# Altium PCB FarhanDaemi.PcbDoc
Units mil, origin at the board's own origin, x right, y up, seen from the top; angles counter-clockwise.
Board outline 2310 x 2065 mil, 2 copper layers (Top Layer, Bottom Layer); 52 components, 0 nets, 189 pads, 53 vias.
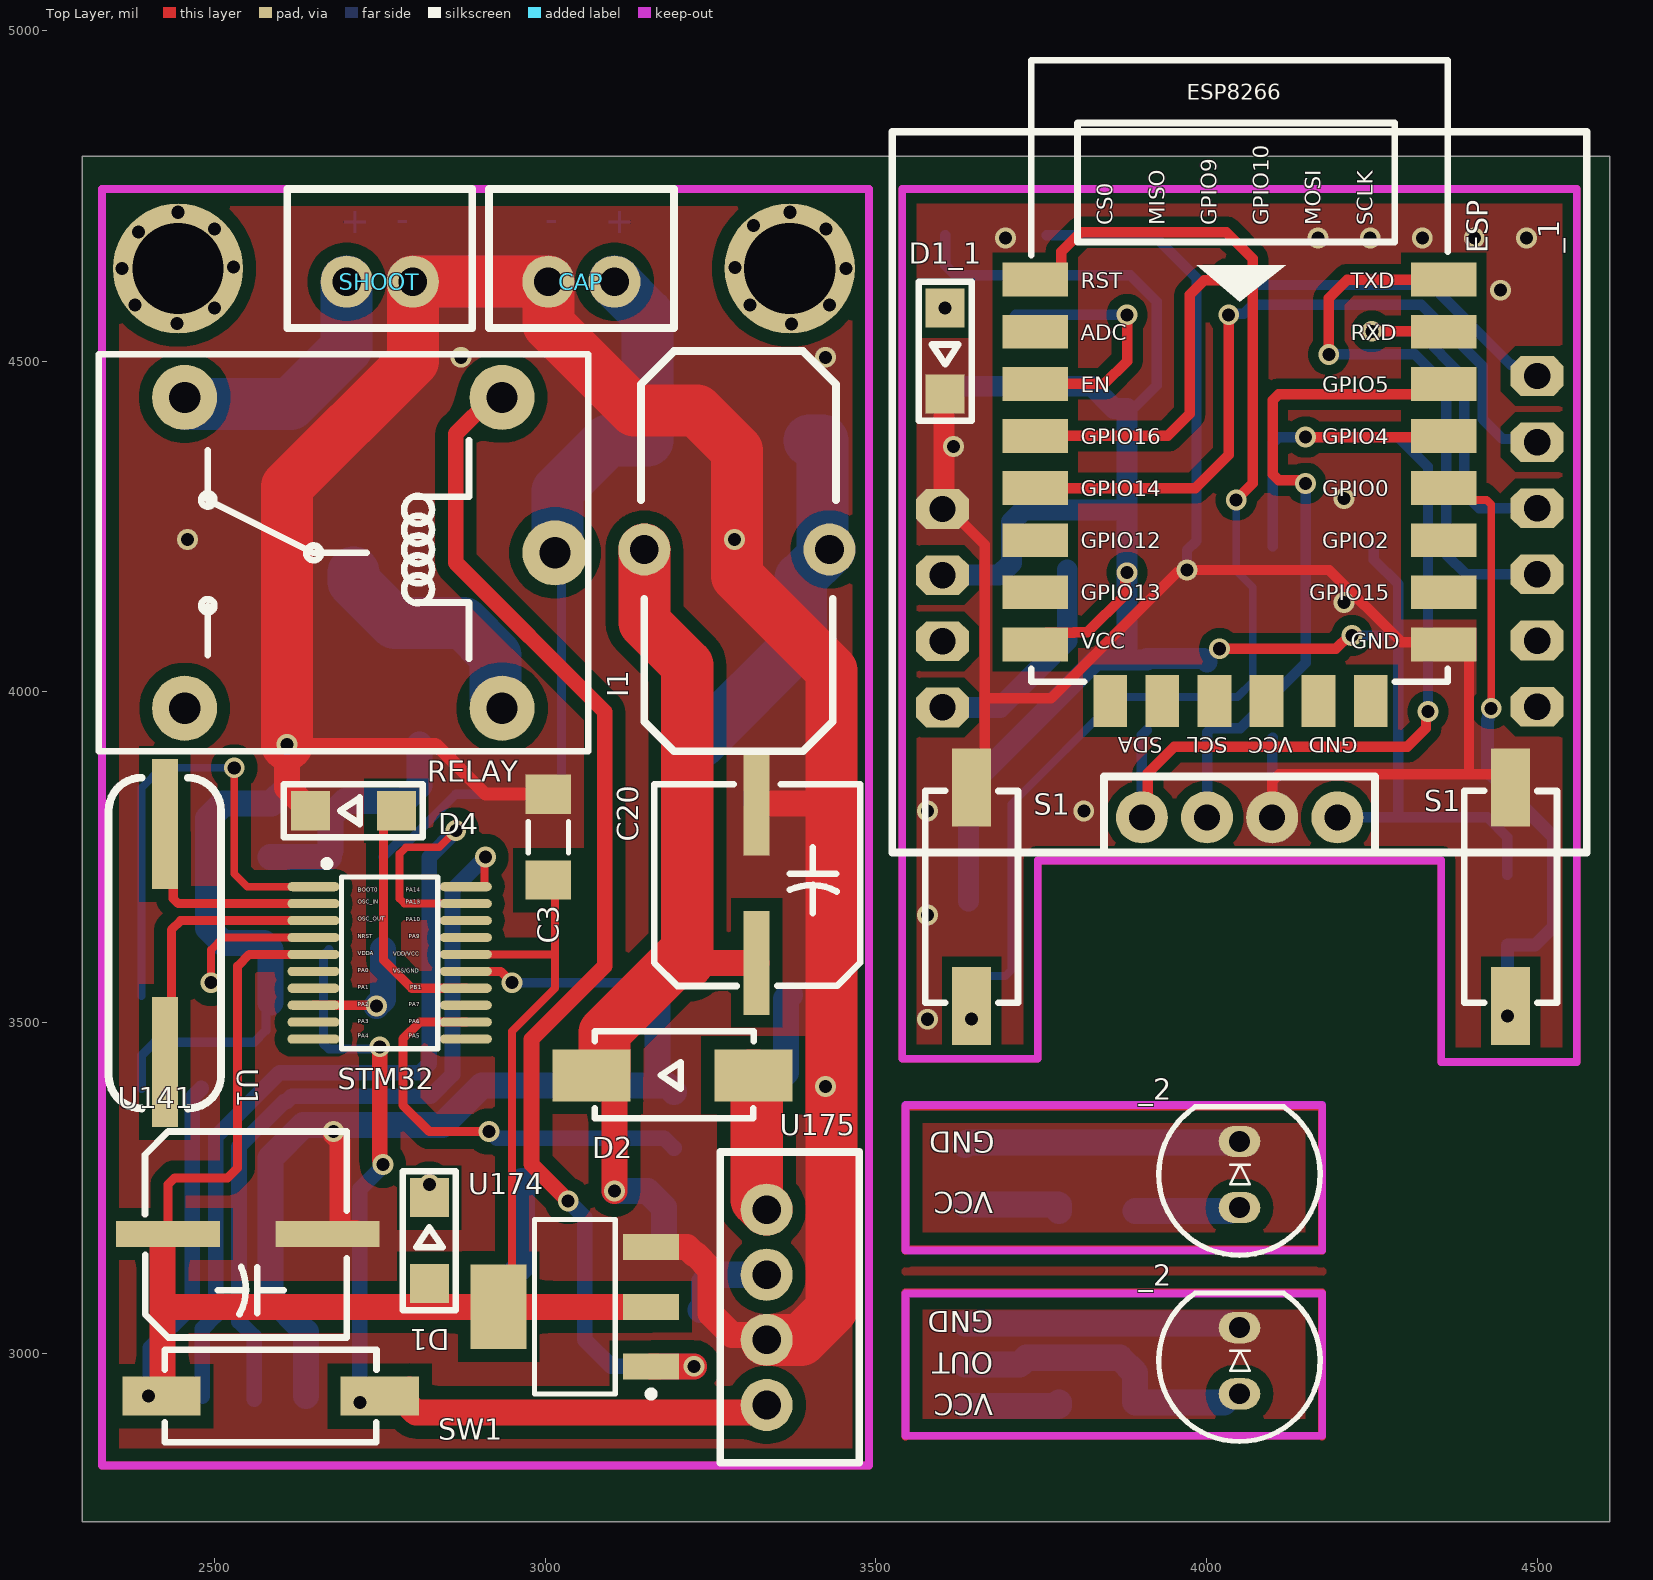
[diagram p0: Top Layer view]
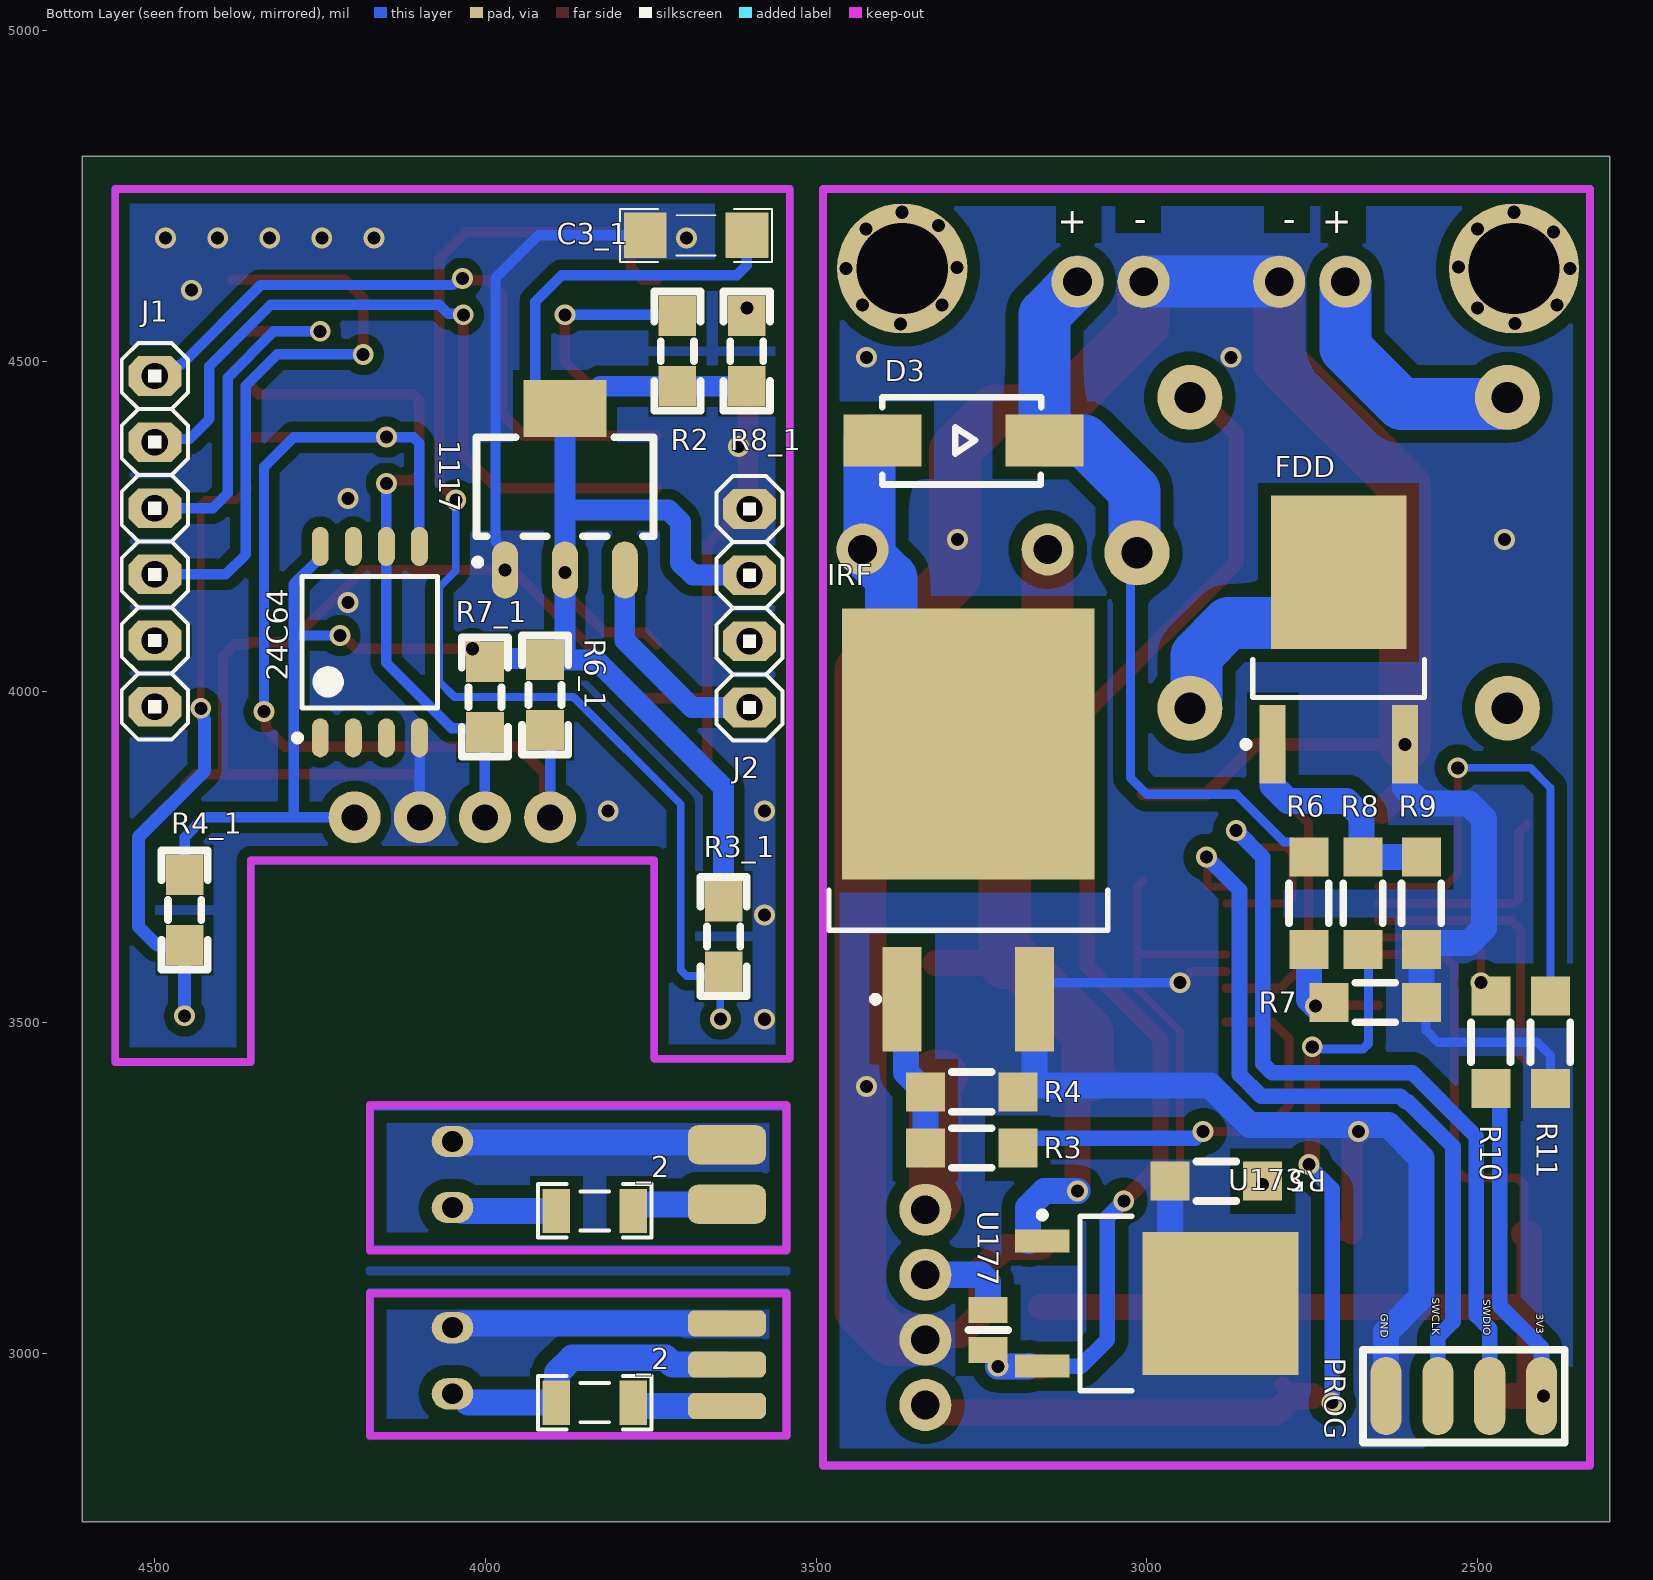
[diagram p1: Bottom Layer view, seen from below]

## Layer stack, top to bottom
Top Solder: solder mask 0.4, Solder Resist, Dk 3.5
Top Layer: signal copper 1.4
Dielectric 1: dielectric 12.6, FR-4, Dk 4.8
Bottom Layer: signal copper 1.4
Bottom Solder: solder mask 0.4, Solder Resist, Dk 3.5

## Board outline
2300,2745 2300,4810 4610,4810 4610,2745

## Design rules (kind name [scope] priority, off if disabled: settings)
Clearance [All] p1: gap=10 ignorepadtopadclearanceinfootprint=FALSE except(0: Arc-Hole Track-Hole SMDPad-Hole THPad-Hole Via-Hole Fill-Hole Poly-Hole Region-Hole Text-Hole)
ComponentClearance [All] p1 off: gap=10 collisioncheckmode=3 verticalgap=10 showdistances=FALSE
Height [All] p1 off: minheight=0 maxheight=1000 prefheight=500
PolygonConnect [All] p1: connectstyle=Relief reliefconductorwidth=10 reliefentries=4 polygonreliefangle="90 Angle" airgapwidth=10
RoutingVias [All] p1: holewidth=28 width=50 viastyle="Through Hole" minholewidth=28 minwidth=50 maxholewidth=28 maxwidth=50
SolderMaskExpansion [All] p1: expansion=4 istentingtop=FALSE
Width [All] p1: maxlimit=10 minlimit=10 preferedwidth=10
28 further rules are at their usual default settings.

## Components (designator, comment, footprint, x,y, rotation, side; value= is the part's Value field where it differs from the comment)
24C64 "Comment" 24C64 4175,4075 r90 bottom
1117 "Comment" SOT223 3880,4310 r90 bottom
_1 "Comment" "OLED 0.96inch" 4050,4301.72 r180 top locked
_2 "Comment" LED5MM_BLUE 4049.92,3270 r90 top
_2 "Comment" LED5MM_BLUE 4049.92,2988.46 r90 top
_2 "Comment" RES1206#1 3834.92,3215 r180 bottom
_2 "Comment" RES1206#1 3834.92,2925 r180 bottom
C3 "Comment" CAP1206 3005,3780 r90 top
C3_1 "Comment" CAPC4817X12N 3681.77,4690 r180 bottom
C20 "Comment" "CAP SMD 100uF 16V" 3320,3710 r90 top
CAP "Comment" "XH 2pin" 3055,4655 r0 top
D1 "Comment" "LED BLUE 1206" 2825,3170 r90 top
D1_1 "Comment" "LED BLUE 1206" 3605,4515 r270 top
D2 "Comment" Diode 3195,3420 r180 top
D3 "Comment" Diode 3280,4380 r180 bottom
D4 "Comment" "LED BLUE 1206" 2710,3820 r180 top
ESP "Comment" ESP8266 4050,4475 r0 top locked
FDD "Comment" FDD6690A 2710,4080 r90 bottom
I1 "Comment" inductor 3290,4220 r0 top
IRF "Comment" IRF540S 3270,3796.81 r90 bottom
J1 "Comment" My_1X06 4500.1,4227.42 r90 bottom locked
J2 "Comment" My_1X04 3600.9,4126.28 r90 bottom locked
PROG "Comment" PROGRAMER 2523.33,2935 r0 bottom
R2 "Comment" RESC3413X04N 3710,4515 r270 bottom
R3 "Comment" RES1206#2 3265,3310 r180 bottom
R3_1 "Comment" RESC3413X04N 3640,3630 r90 bottom
R4 "Comment" RES1206#2 3265,3394.9 r180 bottom
R4_1 "Comment" RESC3413X04N 4455,3670 r270 bottom
R5 "Comment" RES1206#2 2895,3260 r0 bottom
R6 "Comment" RES1206#2 2755,3680 r90 bottom
R6_1 "Comment" RESC3413X04N 3910,3995 r270 bottom
R7 "Comment" RES1206#2 2655,3530 r180 bottom
R7_1 "Comment" RESC3413X04N 4000.95,3991.85 r270 bottom
R8 "Comment" RES1206#2 2673.37,3680 r270 bottom
R8_1 "Comment" RESC3413X04N 3605,4515 r270 bottom
R9 "Comment" RES1206#2 2585,3680 r270 bottom
R10 "Comment" RES1206#2 2480,3470 r270 bottom
R11 "Comment" RES1206#2 2389.95,3470 r270 bottom
RELAY "Comment" "Relay 5V 10A" 2695,4210 r0 top
S1 "Comment" pushbutton 4460,3690 r90 top
S1 "Comment" pushbutton 3645,3690 r90 top
SHOOT "Comment" "XH 2pin" 2750,4655 r0 top
STM32 "Comment" STM32F030F4P6 2765,3590 r0 top
SW1 "Comment" pushbutton 2585,2935 r180 top
U1 "Comment" "Crystal Oscilator" 2425,3620 r270 top
U141 "Comment" "CAP SMD 100uF 16V" 2550,3180 r0 top
U173 "Comment" "7805 (SOT-252)" 2985,3075 r180 bottom
U174 "Comment" AMS1117 3045,3070 r180 top
U175 "Comment" "XH 4PIN" 3370,3069.08 r270 top
U177 "Comment" Jumper 3240,3035 r90 bottom
? "Comment" SCREW 2445,4640 r0 top
? "Comment" SCREW 3370,4640 r270 top

## Footprints (in the part's own frame and the unit in brackets; to place one, negate y for a bottom-side part, rotate by r counter-clockwise, add the part's x,y. Pads: shape width x height; smd on the part's side, far side on the other; paste and mask are expansions set on the pad)
24C64 [mm] "SOIC, 8-Leads, Body 5.21x5.28mm, Pitch 1.27mm, IPC Medium Density"
  oval 1.5x0.65 smd: 1(-3.675,1.905) 2(-3.675,0.635) 3(-3.675,-0.635) 4(-3.675,-1.905) 5(3.675,-1.905) 6(3.675,-0.635) 7(3.675,0.635) 8(3.675,1.905)
  silkscreen extent -3.8,-2.6 2.53,2.91, body extent -3.98,-2.6 3.98,2.6, height 1.97
"7805 (SOT-252)" [mm] "D-PAK, 3-Pads, Body 6.25x6.71mm (max), IPC Medium Density"
  rect 2.1x0.9 smd: 1(-4.4,2.4) 3(-4.4,-2.4)
  rect 6x5.5 smd: 4(2.45,0)
  silkscreen extent -4.52,-3.35 -0.95,3.52, body extent -5.06,-3.35 4.85,3.35, height 2.45
AMS1117 [mm] "SOT223, 4-Leads, Body 6.30x7.00mm (avg), Pitch 2.30mm, IPC Medium Density"
  rect 2.15x1 smd: 1(-2.925,2.3) 2(-2.925,0) 3(-2.925,-2.3)
  rect 2.15x3.25 smd: 4(2.925,0)
  silkscreen extent -3.05,-3.35 1.55,3.47, body extent -3.5,-3.35 3.5,3.35, height 1.65
CAP1206 [mm] "Chip Capacitor, 2-Leads, Body 3.20x1.60mm, IPC Medium Density"
  rect 1.5x1.75 smd: 1(-1.651,0) 2(1.651,0)
  silkscreen extent -0.6,-0.77 0.6,0.77, body extent -1.6,-0.8 1.6,0.8, height 1
"CAP SMD 100uF 16V" [mm]
  rect 4x1 smd: 1(-3.048,0) 2(3.07,0.003)
  silkscreen extent -3.94,-3.97 3.81,3.94, body extent -4.75,-4.15 4.75,4.15, height 10.51
CAPC4817X12N [mm] "Chip Capacitor, 2-Leads, Body 4/80x1/70mm, IPC Medium Density-Design:Abbas Basereh"
  rect 1.65x1.75 smd: 1(-1.95,0) 2(1.95,0)
  silkscreen extent -2.92,-1.02 2.92,1.02, body extent -1.6,-0.8 1.6,0.8, height 1
"Crystal Oscilator" [mm]
  rect 5x1 smd: 1(-4.572,0) 2(4.572,0)
  silkscreen extent -6.35,-2.16 6.35,2.16, body extent -6.5,-2.35 6.5,2.35, height 4.21
Diode [mm]
  rect 3x2 smd: 1(-3.048,0) 2(3.175,0)
  silkscreen extent -3.06,-1.69 3.05,1.65, body extent -3.12,-1.78 3.12,1.78, height 2.26
ESP8266 [mm]
  rect 2.5x1.3 smd: 1(-7.845,3.763) 2(-7.845,1.761) 3(-7.845,-0.24) 4(-7.845,-2.242) 5(-7.845,-4.243) 6(-7.845,-6.244) 7(-7.845,-8.246) 8(-7.845,-10.247) 15(7.845,-10.247) 16(7.845,-8.246) 17(7.845,-6.244) 18(7.845,-4.243) 19(7.845,-2.242) 20(7.845,-0.24) 21(7.845,1.761) 22(7.845,3.763)
  rect 1.3x2 smd: 9(-4.967,-12.417) 10(-2.965,-12.417) 11(-0.964,-12.417) 12(1.037,-12.417) 13(3.039,-12.417) 14(5.04,-12.417)
  silkscreen extent -8,-11.68 8,12.19, body extent -8,-11.75 8,12.25, height 3.17
FDD6690A [mm] "D-PAK, 3-Pads, Body 5.85x6.66mm (max), IPC Medium Density"
  rect 3x1 smd: 1(-4.05,2.54) 3(-4.05,-2.54)
  rect 5.9x5.2 smd: 4(2.55,0)
  silkscreen extent -4.17,-3.3 -0.8,3.69, body extent -5,-3.3 5,3.3, height 3.03
inductor [mm]
  round 2 hole 1.1: 1(-3.556,-0.127) 2(3.556,-0.127)
  silkscreen extent -3.68,-7.87 3.81,7.49, body extent -4.15,-8.42 4.15,8.17, height 16.29
IRF540S [mm] "D2-PAK, 3-Pads, Body 7.93x8.70mm (max), IPC Medium Density"
  rect 4x1.5 smd: 1(-6.65,2.54) 3(-6.65,-2.54)
  rect 10.4x9.7 smd: 4(3.15,0)
  silkscreen extent -6.77,-5.35 -2.45,5.35, body extent -7.65,-5.33 7.6,5.33, height 5.08
Jumper [mm]
  rect 1x1.5 smd: 1(-0.762,0) 2(0.762,0)
  silkscreen extent 0,-0.76 0,0.76
LED5MM_BLUE [mm] "LED 5MM THROUGH HOLE BLUE-Designer Abbas Basereh"
  oval 1.2x1.6 hole 0.8: 1(-1.27,0) 2(1.27,0)
  silkscreen extent -3.1,-3.1 2.6,3.1, body extent -2.99,-2.98 2.43,3.04, height 12.31
"LED BLUE 1206" [mm]
  rect 1.5x1.5 smd: 1(-1.651,0) 2(1.651,0)
  silkscreen extent -2.67,-1.02 2.67,1.02, body extent -1.61,-0.85 1.66,0.8, height 0.9
My_1X04 [mil]
  oct 60x80 hole 40: 1(-150,0) 2(-50,0) 3(50,0) 4(150,0)
  silkscreen extent -200,-50 200,50, body extent -198,-49 202,51, height 234
My_1X06 [mil]
  oct 60x80 hole 40: 1(-250,0) 2(-150,0) 3(-50,0) 4(50,0) 5(150,0) 6(250,0)
  silkscreen extent -300,-50 300,50, body extent -300,-51 300,49, height 234
"OLED 0.96inch" [mm]
  round 2 hole 1: 1(-3.758,12.49) 2(-1.256,12.49) 3(1.246,12.49) 4(3.748,12.49)
  silkscreen extent -13.34,-13.84 13.34,13.84, body extent -13.5,-14 13.5,14, height 8.01
PROGRAMER [mm]
  oval 1.2x3 smd: 1(-3.048,0) 2(-1.058,0) 3(0.931,0) 4(2.921,0)
  silkscreen extent -3.94,-1.78 3.81,1.78
pushbutton [mm]
  rect 3x1.5 smd: 1(-4.191,0) 2(4.191,0)
  silkscreen extent -4.06,-1.78 4.06,1.78, body extent -4.17,-1.82 4.17,1.82, height 4.25
"Relay 5V 10A" [mm]
  round 2.5 hole 1.2: 1(-6.096,5.969) 2(-6.096,-5.969) 3(6.096,-5.969) 4(6.096,5.969) 5(8.128,0)
  silkscreen extent -9.4,-7.62 9.4,7.62, body extent -9.6,-7.8 9.6,7.8, height 15.9
RES1206#1 [mm] "Chip Resistor, 2-Leads, Body 3/20x1/60mm, IPC Medium Density DESIGNER:ABBAS BASEREH"
  rect 1.05x1.7 smd: 1(-1.475,0) 2(1.475,0)
  silkscreen extent -2.17,-1.02 2.17,1.02, body extent -1.65,-0.85 1.65,0.85, height 0.94
RES1206#2 [mm]
  rect 1.5x1.5 smd: 1(-1.778,0) 2(1.778,0)
  silkscreen extent -0.76,-0.76 0.76,0.76, body extent -1.58,-0.82 1.58,0.82, height 0.53
RESC3413X04N [mm] "Chip Resistor, 2-Leads, Body 3/40x1/30mm, IPC Medium Density-Design:Abbas Basereh"
  rect 1.55x1.45 smd: 1(-1.35,0) 2(1.35,0)
  silkscreen extent -2.29,-0.89 2.29,0.89, body extent -1.25,-0.62 1.25,0.62, height 0.79
SCREW [mm]
  round 5 hole 3.5: 1(0,0)
  round 0 hole 0.5: ""(-2.159,0) ""(-1.651,-1.397) ""(-1.524,1.397) ""(-0.031,-2.11) ""(0,2.159) ""(1.397,-1.524) ""(1.397,1.524) ""(2.128,0.059)
SOT223 [mm] "SOT223, 4-Leads, Body 6.5x3.5mm, Pitch 2.30mm-Designer Abbas Basereh"
  oval 2.2x1 smd: 1(-3.2,2.3) 2(-3.2,0) 3(-3.2,-2.3)
  rect 2.2x3.2 smd: 4(3,0)
  Top Layer pour cut-out: -1.7,3.556 1.7,3.556 1.7,-3.556 -1.7,-3.556
  silkscreen extent -3.02,-3.4 1.9,3.48, body extent -3.5,-3.25 3.5,3.25, height 1.7
STM32F030F4P6 [mm] "TSOP, 20-Leads, Body 6.50x4.40mm, Pitch 0.65mm, IPC Medium Density"
  oval 2x0.35 smd: 1(-2.925,2.925) 2(-2.925,2.275) 3(-2.925,1.625) 4(-2.925,0.975) 5(-2.925,0.325) 6(-2.925,-0.325) 7(-2.925,-0.975) 8(-2.925,-1.625) 9(-2.925,-2.275) 10(-2.925,-2.925) 11(2.925,-2.925) 12(2.925,-2.275) 13(2.925,-1.625) 14(2.925,-0.975) 15(2.925,-0.325) 16(2.925,0.325) 17(2.925,0.975) 18(2.925,1.625) 19(2.925,2.275) 20(2.925,2.925)
  silkscreen extent -2.54,-3.3 1.85,3.93, body extent -3.15,-3.3 3.15,3.3, height 1.2
"XH 2pin" [mm]
  round 2 hole 1.1: 1(-1.27,-0.889) 2(1.27,-0.889)
  silkscreen extent -3.56,-2.67 3.56,2.67, body extent -3.7,-2.88 3.7,2.88, height 7
"XH 4PIN" [mm]
  round 2 hole 1.1: 1(-3.753,-0.889) 2(-1.253,-0.889) 3(1.247,-0.889) 4(3.747,-0.889)
  silkscreen extent -5.97,-2.67 5.97,2.67, body extent -6.2,-2.88 6.2,2.88, height 7

## Free pads (board coordinates)
  rrect50% 118.11x39.37 smd far side: 4(3634.92,2920) 4(3634.92,2982.5) 4(3634.92,3045)
  rrect50% 118.11x59.06 smd far side: 4(3634.92,3225) 4(3634.92,3315)

## Via types
v1: diameter 31.5, hole 19.68, Top Layer to Bottom Layer, tented both sides, 53 vias

## Nets (pads, with @x,y where several pads share a name; then routed paths per layer and width w, separated by ;. In a path a pad name is that pad's centre, name@x,y a point inside that pad or via, vN(x,y) a via of type N, cw(c..) or ccw(c..) an arc to the next point about the centre after c; other vN are vias at no path point)
pads on no net: 24C64.1 24C64.2 24C64.3 24C64.4 24C64.5 24C64.6 24C64.7 24C64.8 1117.1 1117.2 1117.3 1117.4 ?. ?.1 _1.1 _1.2 _1.3 _1.4 _2.1 _2.2 C3.1 C3.2 C3_1.1 C3_1.2 C20.1 C20.2 CAP.1 CAP.2 D1.1 D1.2 D1_1.1 D1_1.2 D2.1 D2.2 D3.1 D3.2 D4.1 D4.2 ESP.1 ESP.2 ESP.3 ESP.4 ESP.5 ESP.6 ESP.7 ESP.8 ESP.9 ESP.10 ESP.11 ESP.12 ESP.13 ESP.14 ESP.15 ESP.16 ESP.17 ESP.18 ESP.19 ESP.20 ESP.21 ESP.22 FDD.1 FDD.3 FDD.4 I1.1 I1.2 IRF.1 IRF.3 IRF.4 J1.1 J1.2 J1.3 J1.4 J1.5 J1.6 J2.1 J2.2 J2.3 J2.4 PROG.1 PROG.2 PROG.3 PROG.4 R2.1 R2.2 R3.1 R3.2 R3_1.1 R3_1.2 R4.1 R4.2 R4_1.1 R4_1.2 R5.1 R5.2 R6.1 R6.2 R6_1.1 R6_1.2 R7.1 R7.2 R7_1.1 R7_1.2 R8.1 R8.2 R8_1.1 R8_1.2 R9.1 R9.2 R10.1 R10.2 R11.1 R11.2 RELAY.1 RELAY.2 RELAY.3 RELAY.4 RELAY.5 S1.1 S1.2 SHOOT.1 SHOOT.2 STM32.1 STM32.2 STM32.3 STM32.4 STM32.5 STM32.6 STM32.7 STM32.8 STM32.9 STM32.10 STM32.11 STM32.12 STM32.13 STM32.14 STM32.15 STM32.16 STM32.17 STM32.18 STM32.19 STM32.20 SW1.1 SW1.2 U1.1 U1.2 U141.1 U141.2 U173.1 U173.3 U173.4 U174.1 U174.2 U174.3 U174.4 U175.1 U175.2 U175.3 U175.4 U177.1 U177.2
copper on no net: | length 71100.4
  Top Layer w11.81: v1(2495,3560) 2495,3610 2513.39,3628.39 2649.84,3628.39 ; v1(2530,3885) 2530,3725 2549.84,3705.16 2649.84,3705.16 ; v1(2865,3790) 2839.83,3764.83 2789.83,3764.83 2780,3755 2780,3686.86 2786.92,3679.94 2879.78,3679.94 2880.16,3679.57 ; 2880.16,3602.8 3015,3602.8 ; 2880.16,3705.16 2907.46,3705.16 2908.37,3706.07 2908.37,3748.37 v1(2910,3750) ; 2929.84,3070 2950,3090.16 2950,3486.76 3015,3551.76 3015,3602.8 ; 3005,3715 3015,3705 3015,3602.8 ; 3545,2873.46 3545,3091.54 4174.92,3091.54 4174.92,2873.46 ; 3545,2875 4174.92,2875 ; 3545,3155 3545,3373.07 4174.92,3373.07 4174.92,3155 ; 3545,3156.54 4174.92,3156.54 ; 4358.87,4307.96 4376.83,4290 4423.66,4290 4430.58,4283.08 v1(4430.58,3975) ; 2330,2830 2330,4760 3490,4760 3490,2830 2330,2830 ; 3540,3445 3540,4760 4560,4760 4560,3440 4355,3440 4355,3745 3745,3745 3745,3445 3540,3445
  Top Layer w13.78: 2425,3440 2435,3450 2435,3640 2448.98,3653.98 2649.84,3653.98 ; 2425,3800 2437.8,3787.2 2437.8,3687.2 2445.43,3679.57 2649.84,3679.57 ; 2430,3195 2430,3255 2440,3265 2520,3265 2535,3280 2535,3585 2552.8,3602.8 2649.84,3602.8 ; 2649.84,3526.02 2743.98,3526.02 v1(2745,3525) ; 2775,3820 2755.39,3800.39 2755.39,3594.61 2798.39,3551.61 2880.16,3551.61 ; 2880.16,3500.43 2810.43,3500.43 2785,3475 2785,3375 2825,3335 v1(2915,3335) ; 2880.16,3577.2 2932.8,3577.2 v1(2950,3560)
  Top Layer w15.75: 3600.9,4276.28 3610.9,4276.28 3665,4222.18 3665,3990 ; 3645,3855 3665,3875 3665,3990 ; 3741.13,4071.57 3758.84,4089.29 3799.29,4089.29 3800,4090 3820,4090 3876.99,4146.99 3876.99,4176.99 v1(3880,4180) ; 3741.13,4307.96 3982.96,4307.96 4033.62,4358.62 v1(4033.62,4570) ; 3741.13,4386.75 3941.75,4386.75 3975,4420 3975,4600 3996.99,4621.99 4031.99,4621.99 v1(4035,4625) ; 3741.13,4465.54 3845.54,4465.54 3880,4500 v1(3880,4570) ; 3741.13,4623.13 3762.48,4623.13 3780.2,4640.85 3780.2,4665.2 3810,4695 4030,4695 4070,4655 4070,4315 v1(4045,4290) ; 3902.46,3810 3911.5,3819.04 3911.5,3876.55 3951.56,3916.61 4303.74,3916.61 4331.99,3944.86 4331.99,3966.99 v1(4335,3970) ; v1(4020,4065) 4195.74,4065 4215.74,4085 v1(4220,4085) ; 4099.44,3810 4099.44,3864.44 4110.12,3875.12 4396.96,3875.12 ; v1(4150,4315) 4145.48,4319.52 4109.23,4319.52 4100,4328.74 4100,4440.77 4109.23,4450 4343.33,4450 4358.87,4465.54 ; v1(4150,4385) 4357.12,4385 4358.87,4386.75 ; v1(4185,4510) 4185,4595 4213.13,4623.13 4358.87,4623.13 4382.5,4623.13 ; v1(4250,4545) 4358.21,4545 4358.87,4544.34 ; 4455,3858.46 4438.35,3875.12 4396.96,3875.12 ; 3665,3990 3765,3990 3956,4181 3967.54,4181 v1(3970.55,4184.02) 4185.98,4184.02 4295.26,4074.74 4355.71,4074.74 4358.87,4071.57 4379.24,4071.57 4396.96,4053.86 4396.96,3875.12
  Top Layer w19.68: v1(2610,3920.55) 2834.45,3920.55 2910,3845 3005,3845
  Top Layer w23.62: v1@2750,3460.98 2750,3292.13 2755,3287.13 v1(2755,3285) ; 2777.28,2935 2795,2952.72 ; 2935,4445 2920,4445 2865,4390 2865,4195 3090,3970 3090,3585 2979.53,3474.53 2979.53,3285.47 v1(3035,3230)
  Top Layer w31.5: v1(2680,3335) 2680,3330.21 2690,3320.21 2690,3180.11 ; 2690,3185.11 2713.33,3185.11 ; 3600.9,4276.28 3602.95,4278.34 3602.95,4447.95 3605,4450
  Top Layer w39.37: 2415.08,2939.92 2410.16,2935 v1(2400,2935) 2411.54,2935 2421.39,2944.84 2421.39,3075 ; 2420,2935 2449.53,2935 ; 2430,3180 2421.39,3180 2421.39,3075 ; v1(2610,3920.55) 2610,3855 2645,3820 ; 2750,2935 2777.28,2935 2779.53,2935 2804.53,2910 3312.77,2910 3324.35,2921.58 3335,2921.58 ; 3070,3420 3085.32,3420 3105,3400.32 v1(3105,3245) ; 3160.16,2979.45 3224.45,2979.45 v1(3225,2980) ; 3160.16,3070 2929.84,3070 2426.39,3070 2421.39,3075 ; 3160.16,3160.55 3214.45,3160.55 3225,3150 3226.94,3150 3250,3126.94 3250,3060 3282.47,3027.53 3327.47,3027.53 3335,3020 ; 3215,3590 3320,3590 ; 3319.89,3845 3319.89,3830.87 3428.78,3830.87 3432.91,3835
  Top Layer w78.74: v1(2610,3920.55) 2610,4310 2800,4500 2800,4620 3005,4620 3005,4555 3135,4425 3230,4425 3290,4365 3290,4175 3432.91,4032.09 3432.91,3835 3432.91,3066.13 3386.79,3020 3335,3020 ; 3085.32,3420 3089.68,3420 3089.68,3484.68 3215,3610 ; 3150,4215 3150,4105 3215,4040 3215,3590 ; 3310,3420 3320,3420 3320,3231.84 3335,3216.84
  Bottom Layer w11.81: 2389.95,3540 2389.95,3854.95 2420,3885 v1(2530,3885) ; 3640,3576.85 3645,3571.85 ; v1(3645,3505) 3645,3571.85 ; v1(4045,4290) 4045,4182.87 4070,4157.87 4070,4015 4047.05,3992.05 3867.05,3992.05 3705,3830 3705,3579.22 3695.78,3570 3646.85,3570 3645,3571.85 ; 2330,2830 3490,2830 3490,4760 2330,4760 2330,2830 ; 3540,3445 3540,4760 4560,4760 4560,3440 4355,3440 4355,3745 3745,3745 3745,3445 3540,3445 ; 3545,2875 4174.92,2875 4174.92,3091.54 3545,3091.54 3545,2875 ; 3545,3156.54 4174.92,3156.54 4174.92,3373.07 3545,3373.07 3545,3156.54
  Bottom Layer w13.78: 2389.95,3400 2389.95,3450.2 2409.75,3470 2560,3470 2577.88,3487.88 2577.88,3522.88 2585,3530 ; 2673.37,3610 2665,3601.63 2665,3468.07 2673.07,3460 2746.89,3460 v1(2750,3463.11) ; 2755,3750 2777.64,3772.64 2792.64,3772.64 2865,3845 3000,3845 3025,3870 3025,4200 3015,4210 ; v1(2950,3560) 3147.36,3560 3170,3537.36 3170,3535
  Bottom Layer w15.75: 3605,4690 3605,4645 3620,4630 3885,4630 3925,4590 3925,4463.54 3889.57,4428.11 3880,4428.11 ; 3710,4568.15 3711.85,4570 v1(3880,4570) ; 3758.54,4690 3920,4690 3985,4625 3985,4228.48 3970.55,4214.03 v1(3970.55,4184.02) ; 3902.46,3810 3902.46,3934.31 3910,3941.85 ; 4000.95,3810 4000.95,3938.7 4007.18,3944.93 4051.09,3944.93 4150,4043.84 4150,4219.69 v1(4150,4315) ; v1(4033.62,4570) 4035.02,4571.4 4056.4,4571.4 4070,4585 4325,4585 4417.68,4492.32 4417.68,4412.32 4447.88,4382.12 4495.41,4382.12 4500.1,4377.42 ; v1(4035,4625) 4039.26,4625 4049.26,4615 4340,4615 4460.38,4494.62 4462.52,4494.62 4479.71,4477.42 4500.1,4477.42 ; 4099.44,3810 4099.72,3810.28 4099.72,3930.04 4100,3930.32 ; 4100,4219.69 4100,4375.77 4109.23,4385 v1(4150,4385) 4290,4385 4335,4340 v1(4335,3970) ; v1(4185,4510) 4315,4510 4362.56,4462.44 4362.56,4207.44 4392.58,4177.42 4500.1,4177.42 ; 4197.94,3810 4290,3810 ; v1(4220,4085) 4285,4085 4290,4090 ; 4250,4219.69 4253.21,4216.47 4253.21,4199.74 4290,4162.95 4290,4090 ; v1(4250,4545) 4320,4545 4390.12,4474.88 4390.12,4299.88 4412.58,4277.42 4500.1,4277.42 ; 4455,3723.15 4455,3780 4425,3810 4290,3810 ; 4290,3810 4290,4090
  Bottom Layer w19.68: v1(4430.58,3975) 4426.82,3971.23 4426.82,3960.06 4425,3958.24 4425,3880 4525,3780 4525,3645 4496.85,3616.85 4455,3616.85 v1(4455,3510)
  Bottom Layer w23.62: v1@2403.33,2935 2403.33,3008.33 2466.38,3071.38 2466.38,3386.38 2480,3400 ; 2481.67,2935 2481.67,3036.56 2501.81,3056.7 2501.81,3326.92 2598.63,3423.74 2810.73,3423.74 2824.57,3437.58 2824.57,3749.57 v1(2865,3790) ; 2560,2930 2560,3025 2537.24,3047.76 2537.24,3312.24 2605,3380 2608.75,3380 2617.06,3388.31 2827.06,3388.31 2860,3421.25 2860,3700 v1(2910,3750) ; v1(2720,2925) 2720,3247.87 2755,3282.87 v1(2755,3285) ; v1(2915,3335) 2917.13,3335 2927.13,3325 3180,3325 3195,3310 ; v1(3035,3230) 3060,3205 3060,3020 3100,2980 3177.72,2980 3178.23,2980.51
  Bottom Layer w31.5: 3600.9,3976.28 3688.14,3976.28 3789.45,4077.59 3789.45,4184.02 ; 3600.9,4176.28 3686.55,4176.28 3705,4194.73 3705,4256.55 3723.45,4275 3880,4275 ; 3605,4461.85 3710,4461.85 3826.57,4461.85 3860.31,4428.11 3880,4428.11 3880,4275 ; 3640,3683.15 3640,3855 3833.15,4048.15 3910,4048.15 ; 3880,4050 v1@3880,4184.02 ; v1(3880,4180) v1@3880,4184.02 ; 3910,4050 3995.95,4050 4000.95,4045 ; v1@3880,4184.02 3880,4275
  Bottom Layer w39.37: 2585,3530 2585,3610 2575.16,3619.84 2513.06,3619.84 2490,3642.91 2490,3807.96 2513.06,3831.03 2586.03,3831.03 2610,3855 v1(2610,3920.55) ; 2585,3750 2673.37,3750 2673.37,3757.95 2675.26,3759.84 2675.26,3811.94 2698.32,3835 2786.94,3835 2810,3858.06 2810,3920.55 ; 2638.33,2935 2638.33,3020 2638.33,3031.67 2585,3085 2585,3295 2635,3345 2845,3345 2904.74,3404.74 3170,3404.74 ; v1(2745,3525) 2755,3535 2755,3610 ; 2908.54,3075 2965,3131.46 2965,3260 ; v1(3105,3245) 3155,3245 3180,3220 3180,3171.26 3178.23,3169.49 ; 3170,3535 3170,3404.74 ; 3178.23,2980.51 3178.74,2980 v1(3225,2980) ; 3195,3394.9 3185.16,3404.74 3170,3404.74 ; 3235,3065 3240,3070 3240,3106.89 3251.53,3118.42 3335,3118.42 ; 3335,3300 3335,3394.9 3364.15,3424.05 3364.15,3535.67 3370,3541.52 ; 3634.92,2920 3775.87,2920 3776.85,2920.98 3776.85,2925 ; 3634.92,2982.5 3717.42,2982.5 3727.83,2992.91 3868.95,2992.91 3892.01,2969.85 3892.01,2925.98 3892.99,2925 4026.45,2925 4039.92,2938.46 4049.92,2938.46 ; 3634.92,3045 4033.38,3045 4039.92,3038.46 4049.92,3038.46 ; 3634.92,3225 3775.87,3225 3776.85,3224.02 3776.85,3215 ; 3634.92,3315 3638.41,3318.49 4048.41,3318.49 4049.92,3320 ; 3892.99,3215 4034.92,3215 4039.92,3220 4049.92,3220
  Bottom Layer w78.74: 2455,4435 2615,4435 2700,4520 2700,4620 ; 2710,4180.39 2710,4166.61 2772.99,4103.62 2876.38,4103.62 2925,4055 2925,3990.33 2935,3980.33 2935,3975 ; 2800,4620 3005,4620 ; 3015,4210 3018.77,4213.77 3018.77,4303.77 3095,4380 3155,4380 3155,4570 3105,4620 ; 3235,3924.02 3386.57,4075.59 3386.57,4171.57 3430,4215 3419.68,4225.31 3419.68,4380 3400,4380
  other v1: 2825,3255 3424.02,3403.27 3578.31,3504.76 3578.31,3662.25 3578.31,3819.73 3814.53,3819.73 4208.23,4134.69 2459.45,4230.04 3286.22,4230.04 4208.23,4292.17 3617.68,4370.91 2872.84,4505.63 3424.02,4505.63 3605,4580 4444.45,4607.13 3696.42,4685.87 4168.86,4685.87 4247.6,4685.87 4326.34,4685.87 4405.08,4685.87 4483.82,4685.87

## Polygon pours and split planes (outlines as drawn)
no net on Top Layer "NONET_L01_P015" (solid, pour order 15): 4174.92,2869.08 3545.03,2869.08 cw(c3545,2875) 3540.81,2870.81 cw(c3545,2875) 3539.08,2875.03 3539.08,3156.54 ccw(c3540.25,3156.52) 3539.08,3156.5 3539.08,3156.54 3539.08,3373.07 cw(c3545,3373.07) 3545,3378.99 4174.92,3378.99 cw(c4174.92,3373.07) 4180.84,3373.07 4180.84,2875 cw(c4174.92,2875)
no net on Top Layer "NONET_L01_P012" (solid, pour order 12): 3540,3445 3540,4760 4560,4760 4560,3440 4355,3440 4355,3745 3745,3745 3745,3445
no net on Top Layer "NONET_L01_P000" (solid, pour order 0): 2330,2850 2330,4760 3490,4760 3490,2850
no net on Bottom Layer "NONET_L02_P014" (solid, pour order 14): 4174.92,2869.08 3545.03,2869.08 cw(c3545,2875) 3540.81,2870.81 cw(c3545,2875) 3539.08,2875.03 3539.08,3156.54 ccw(c3540.25,3156.52) 3539.08,3156.5 3539.08,3156.54 3539.08,3373.07 cw(c3545,3373.07) 3545,3378.99 4174.92,3378.99 cw(c4174.92,3373.07) 4180.84,3373.07 4180.84,2875 cw(c4174.92,2875)
no net on Bottom Layer "NONET_L02_P013" (solid, pour order 13): 3540,3445 3540,4760 4560,4760 4560,3440 4355,3440 4355,3745 3745,3745 3745,3445
no net on Bottom Layer "NONET_L02_P001" (solid, pour order 1): 2330,2850 2330,4760 3490,4760 3490,2850

## Keep-outs
Keep-Out Layer:
  lines w11.81: 2330,2830 2330,4760 3490,4760 3490,2830 2330,2830 ; 3540,3445 3540,4760 4560,4760 4560,3440 4355,3440 4355,3745 3745,3745 3745,3445 3540,3445 ; 3545,2875 3545,3090 4175,3090 4175,2875 3545,2875 ; 3545,3155 3545,3375 4175,3375 4175,3155 3545,3155

## Other copper
Bottom Layer:
  text "-" at 2775,4695.32 h39.37
  text "-" at 3000,4695.32 h39.37
  text "+" at 2690,4693.44 h39.37
  text "+" at 3090,4693.44 h39.37

## Silkscreen, mask and mechanical layers (free items; w line width, h text height)
Top Overlay:
  text "GND" at 3679.58,3334.66 h31.5 r180
  text "VCC" at 3677.83,3242.91 h31.5 r180
  text "GND" at 3677.83,3062.91 h31.5 r180
  text "OUT" at 3677.83,3000.41 h31.5 r180
  text "VCC" at 3677.83,2937.91 h31.5 r180
Bottom Overlay:
  text "-" at 2775,4695.32 h39.37
  text "-" at 3000,4695.32 h39.37
  text "+" at 2690,4693.44 h39.37
  text "+" at 3090,4693.44 h39.37
Top Solder:
  lines w11.81: 3544.06,2873.46 3544.06,3091.54 4173.98,3091.54 4173.98,2873.46 ; 3544.06,2875 4173.98,2875 ; 3544.06,3155 3544.06,3373.07 4173.98,3373.07 4173.98,3155 ; 3544.06,3156.54 4173.98,3156.54 ; 2330,2830 2330,4760 3490,4760 3490,2830 2330,2830 ; 3540,3445 3745,3445 3745,3745 4355,3745 4355,3440 4560,3440 4560,4760 3540,4760 3540,3445
Bottom Solder:
  lines w11.81: 2330,2830 3490,2830 3490,4760 2330,4760 2330,2830 ; 3540,3445 3540,4760 4560,4760 4560,3440 4355,3440 4355,3745 3745,3745 3745,3445 3540,3445 ; 3545,2875 4174.92,2875 4174.92,3091.54 3545,3091.54 3545,2875 ; 3545,3156.54 4174.92,3156.54 4174.92,3373.07 3545,3373.07 3545,3156.54
  text "-" at 2775,4695.32 h39.37
  text "-" at 3000,4695.32 h39.37
  text "+" at 2690,4693.44 h39.37
  text "+" at 3090,4693.44 h39.37
Mechanical 1:
  lines w11.81: 3545,3091.54 4174.92,3091.54 ; 3545,3091.54 3545,2875 4174.92,2875 4174.92,3091.54 ; 3545,3091.54 3545,3156.54 ; 3545,3156.54 4174.92,3156.54 ; 3545,3156.54 3545,3373.07 4174.92,3373.07 4174.92,3156.54 ; 4174.92,3091.54 4174.92,3156.54 ; 2330,2830 3490,2830 3490,4760 2330,4760 2330,2830

## Text inside footprints (layer, text, board x,y; h text height)
_1: Top Overlay "SDA" at 3933.61,3930.82 h23.62 r180; Top Overlay "SCL" at 4032.11,3930.82 h23.62 r180; Top Overlay "VCC" at 4130.6,3930.82 h23.62 r180; Top Overlay "GND" at 4229.09,3930.82 h23.62 r180
ESP: Top Overlay "ESP8266" at 3970.12,4895.12 h23.62; Top Overlay "CS0" at 3858.45,4705.12 h23.62 r90; Top Overlay "MISO" at 3937.03,4705.12 h23.62 r90; Top Overlay "GPIO9" at 4015.6,4705.12 h23.62 r90; Top Overlay "GPIO10" at 4094.17,4705.12 h23.62 r90; Top Overlay "MOSI" at 4172.74,4705.12 h23.62 r90; Top Overlay "SCLK" at 4251.31,4705.12 h23.62 r90; Top Overlay "RST" at 3810.12,4610.12 h23.62; Top Overlay "ADC" at 3810.12,4531.55 h23.62; Top Overlay "EN" at 3810.12,4452.98 h23.62; Top Overlay "GPIO16" at 3810.12,4374.4 h23.62; Top Overlay "GPIO14" at 3810.12,4295.83 h23.62; Top Overlay "GPIO12" at 3810.12,4217.26 h23.62; Top Overlay "GPIO13" at 3810.12,4138.69 h23.62; Top Overlay "VCC" at 3810.12,4065.12 h23.62; Top Overlay "TXD" at 4218.09,4610.12 h23.62; Top Overlay "RXD" at 4218.09,4531.55 h23.62; Top Overlay "GPIO5" at 4174.8,4452.98 h23.62; Top Overlay "GPIO4" at 4174.8,4374.4 h23.62; Top Overlay "GPIO0" at 4174.8,4295.83 h23.62; Top Overlay "GPIO2" at 4174.8,4217.26 h23.62; Top Overlay "GPIO15" at 4155.12,4138.69 h23.62; Top Overlay "GND" at 4218.09,4065.12 h23.62
PROG: Bottom Overlay "GND" at 2646.32,3059.78 h11.81 r90; Bottom Overlay "SWDIO" at 2491.36,3081.43 h11.81 r90; Bottom Overlay "3V3" at 2411.36,3059.78 h11.81 r90; Bottom Overlay "SWCLK" at 2568.87,3083.39 h11.81 r90
STM32: Top Overlay "BOOT0" at 2716.77,3697.31 h5.91; Top Overlay "VDD/VCC" at 2770.51,3601.12 h5.91; Top Overlay "OSC_IN" at 2716.77,3679.7 h5.91; Top Overlay "OSC_OUT" at 2716.77,3653.96 h5.91; Top Overlay "NRST" at 2716.77,3627.26 h5.91; Top Overlay "VDDA" at 2716.77,3601.55 h5.91; Top Overlay "PA0" at 2716.77,3575.83 h5.91; Top Overlay "PA1" at 2716.77,3550.12 h5.91; Top Overlay "PA2" at 2716.77,3524.41 h5.91; Top Overlay "PA3" at 2716.77,3498.69 h5.91; Top Overlay "PA4" at 2716.57,3476.57 h5.91; Top Overlay "PA14" at 2789.2,3697.64 h5.91; Top Overlay "PA13" at 2789.2,3679.04 h5.91; Top Overlay "PA10" at 2789.2,3653.3 h5.91; Top Overlay "PA9" at 2794.12,3627.59 h5.91; Top Overlay "VSS/GND" at 2770.51,3575.43 h5.91; Top Overlay "PB1" at 2796.09,3550.45 h5.91; Top Overlay "PA7" at 2794.12,3524.73 h5.91; Top Overlay "PA6" at 2794.12,3499.02 h5.91; Top Overlay "PA5" at 2794.12,3476.57 h5.91